# Altium PCB 4_Lay_PCB.PcbDoc (part 1 of 2)
Units mm, origin at the board's own origin, x right, y up, seen from the top; angles counter-clockwise.
Board outline 51.1 x 56.4 mm, 4 copper layers (Top, Signal Layer 1, Signal Layer 2, Bottom), stack 1.641 mm thick; 149 components, 81 nets, 422 pads, 267 vias.
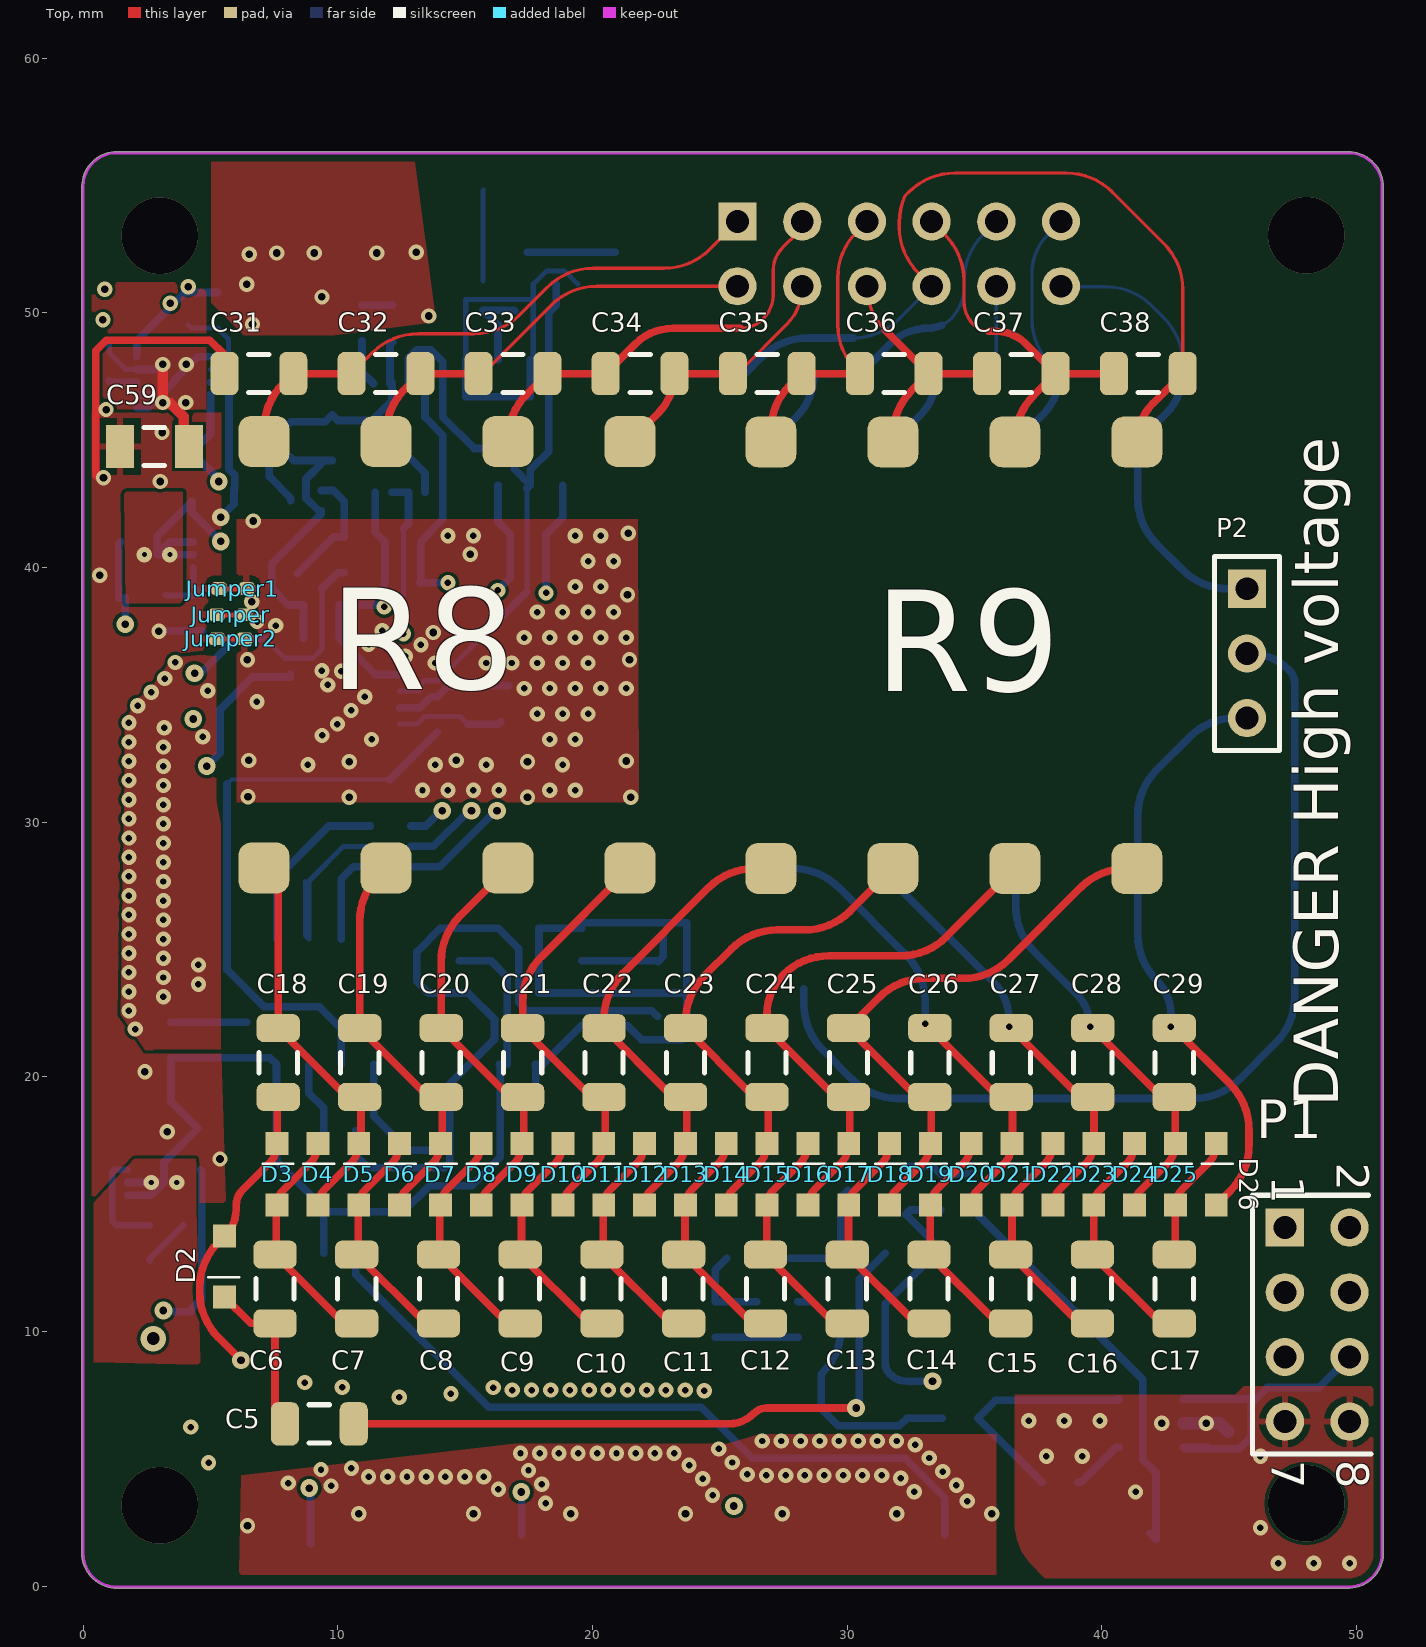
[diagram p0: Top view]
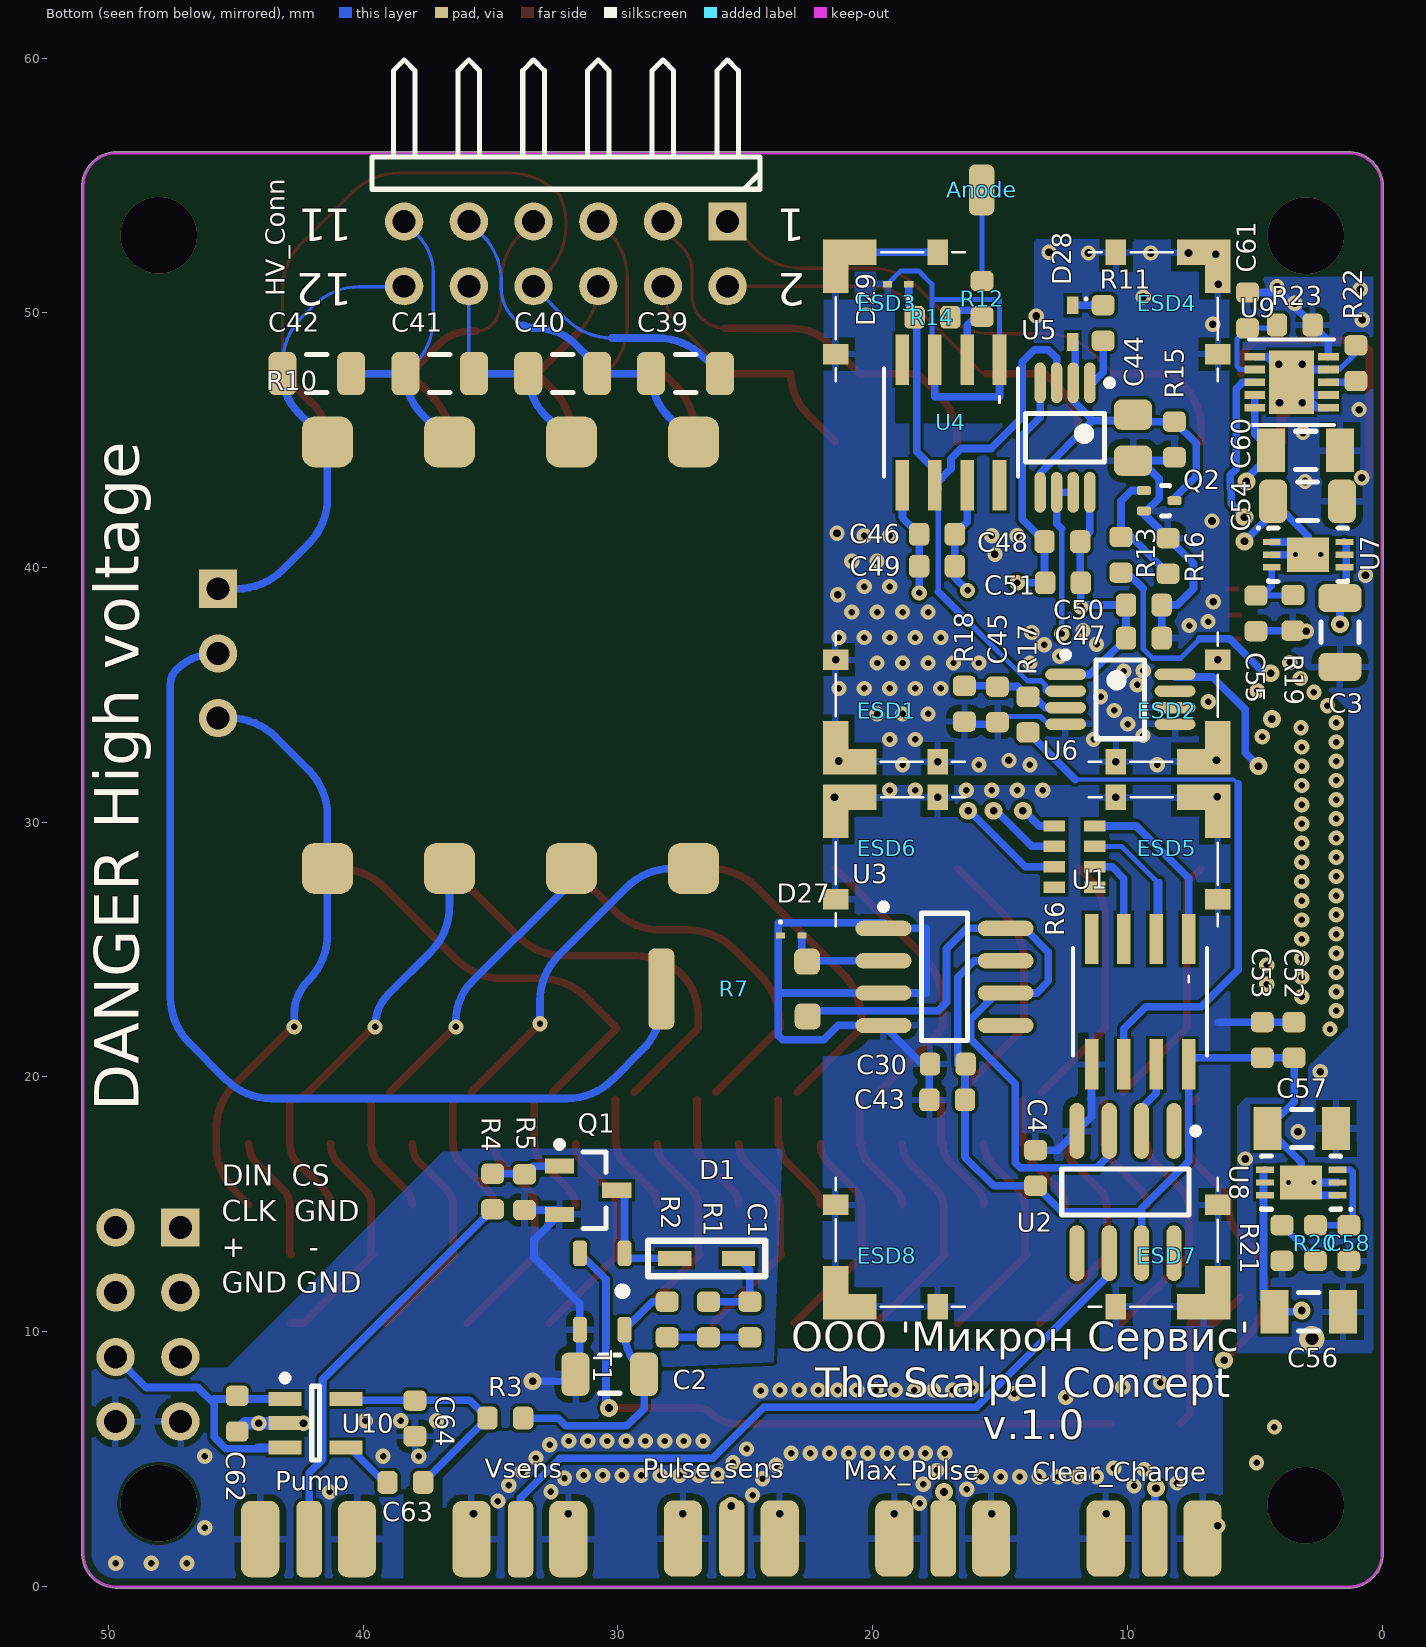
[diagram p1: Bottom view, seen from below]
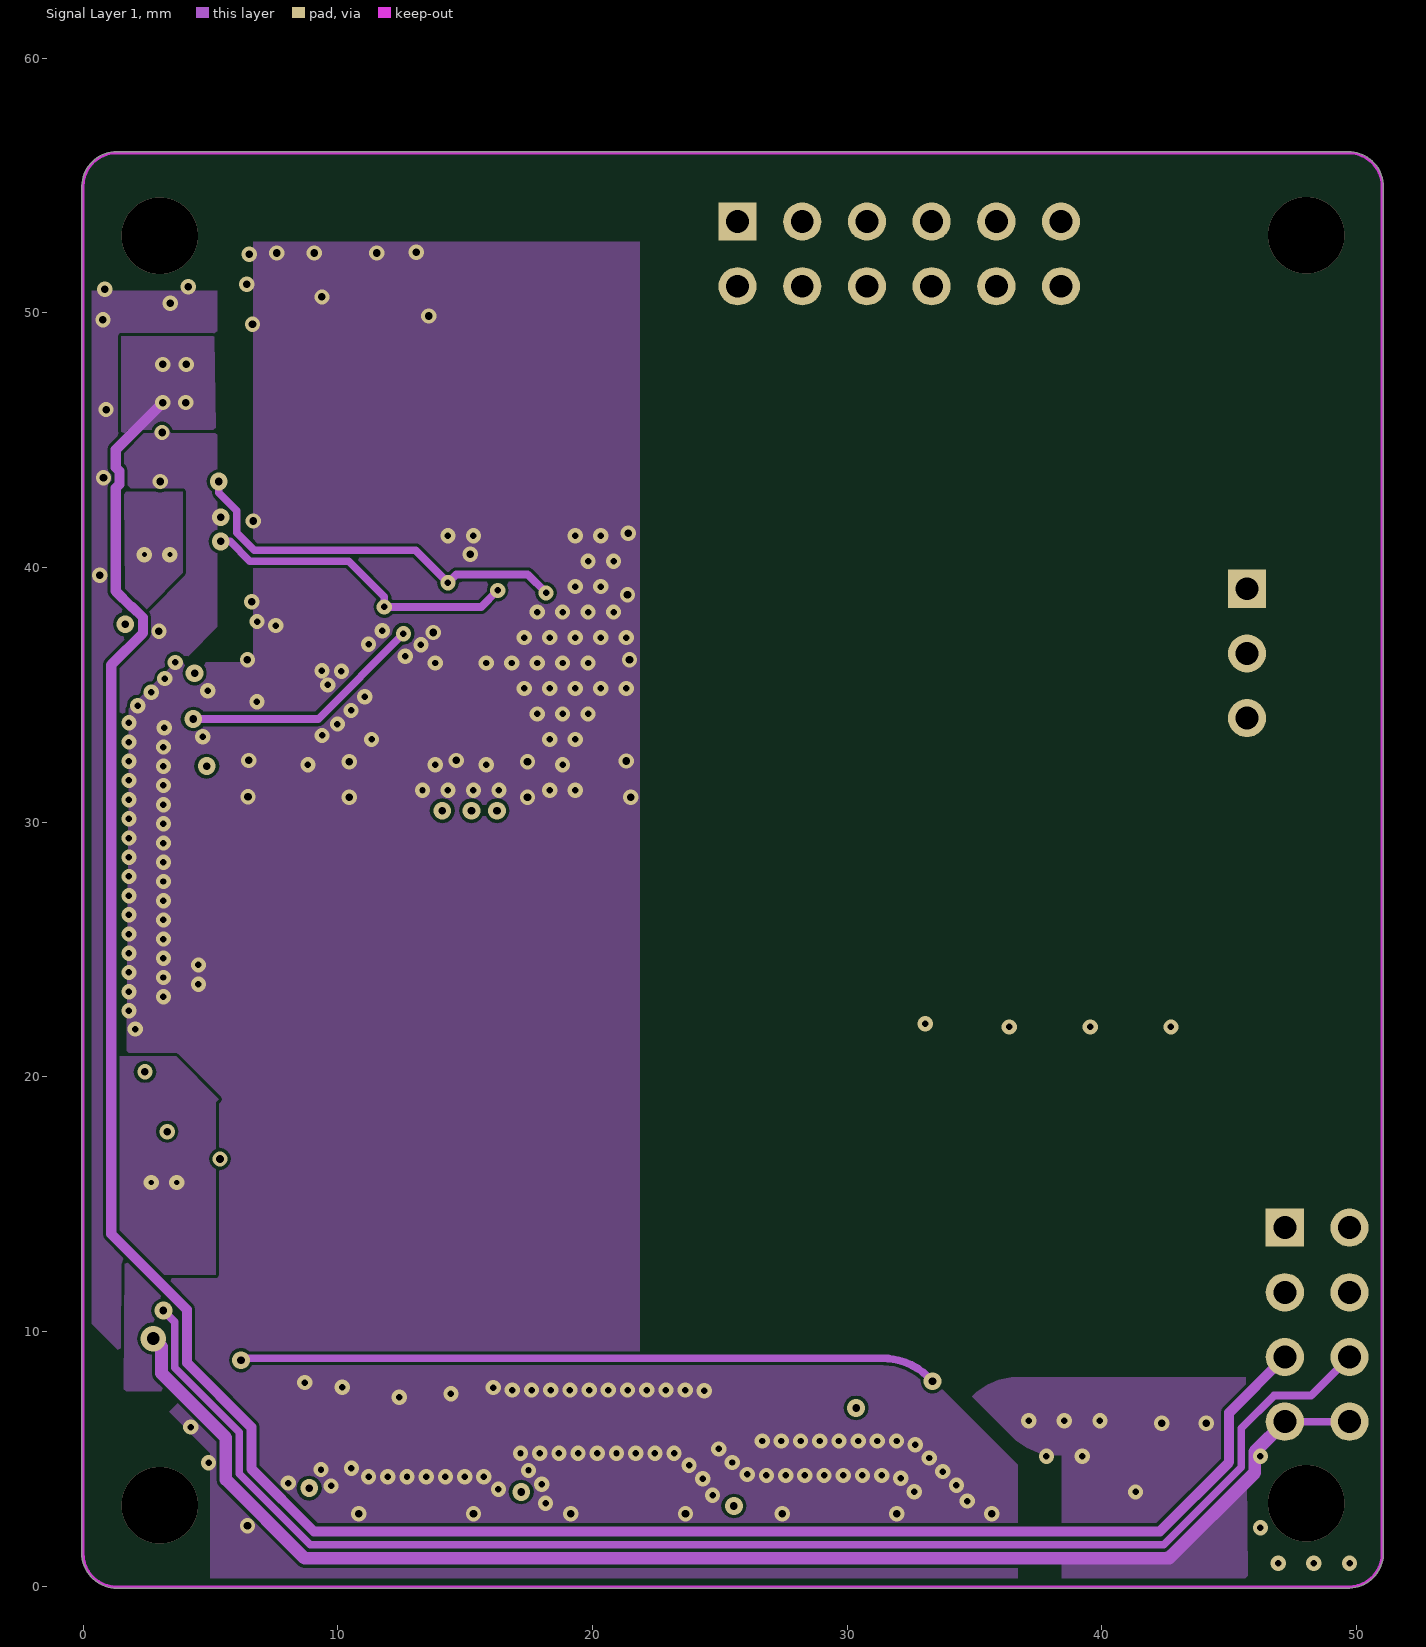
[diagram p2: Signal Layer 1]
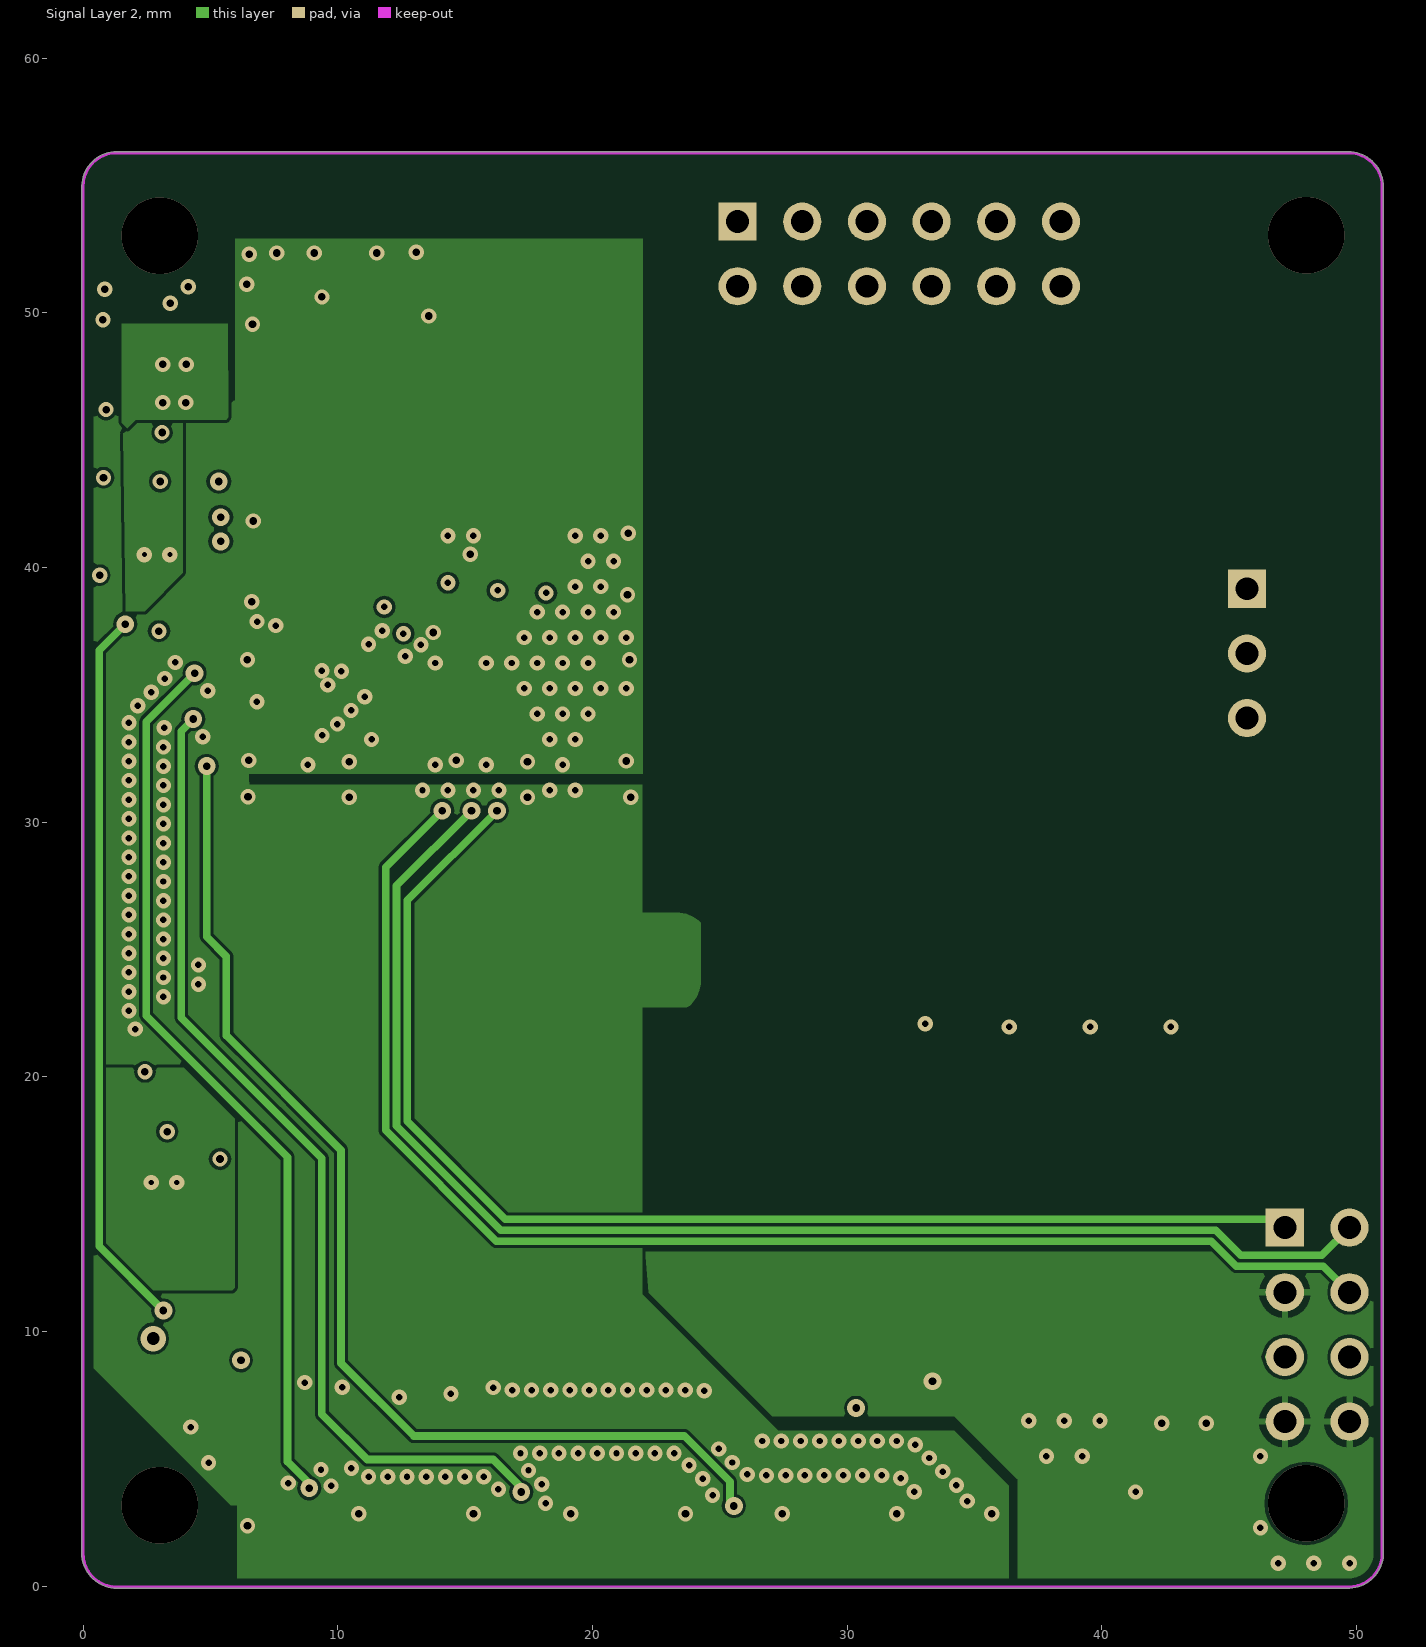
[diagram p3: Signal Layer 2]
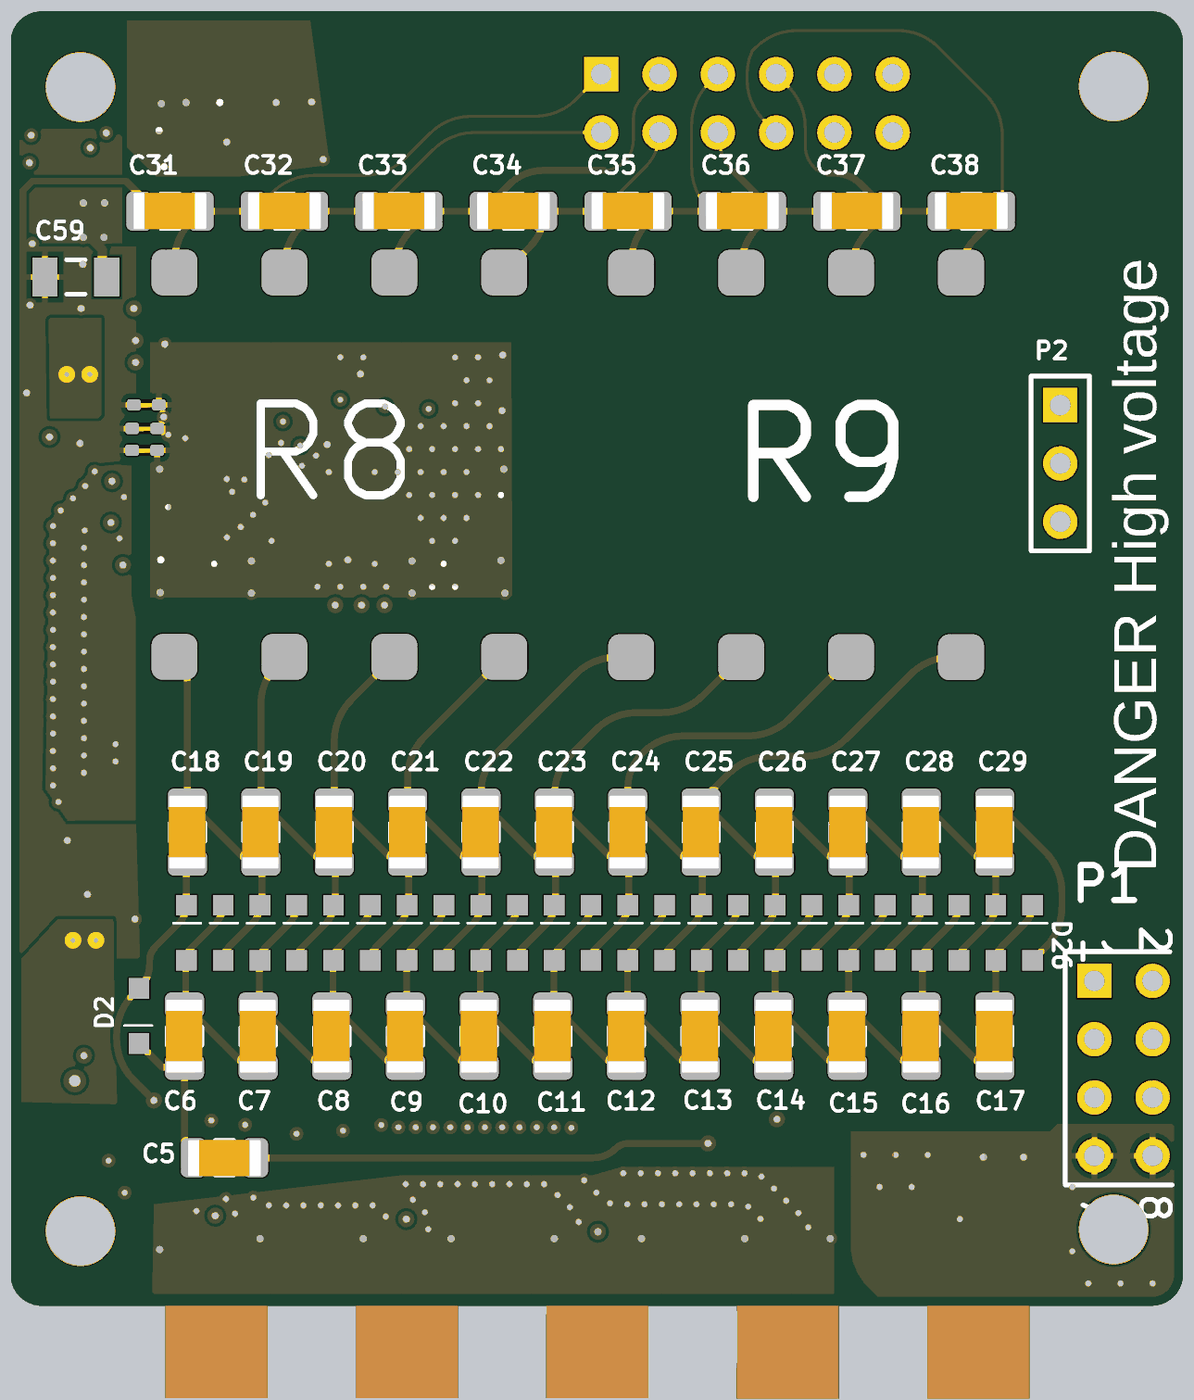
[diagram p5: 3D render of the assembled board from above, using the file's embedded part models]
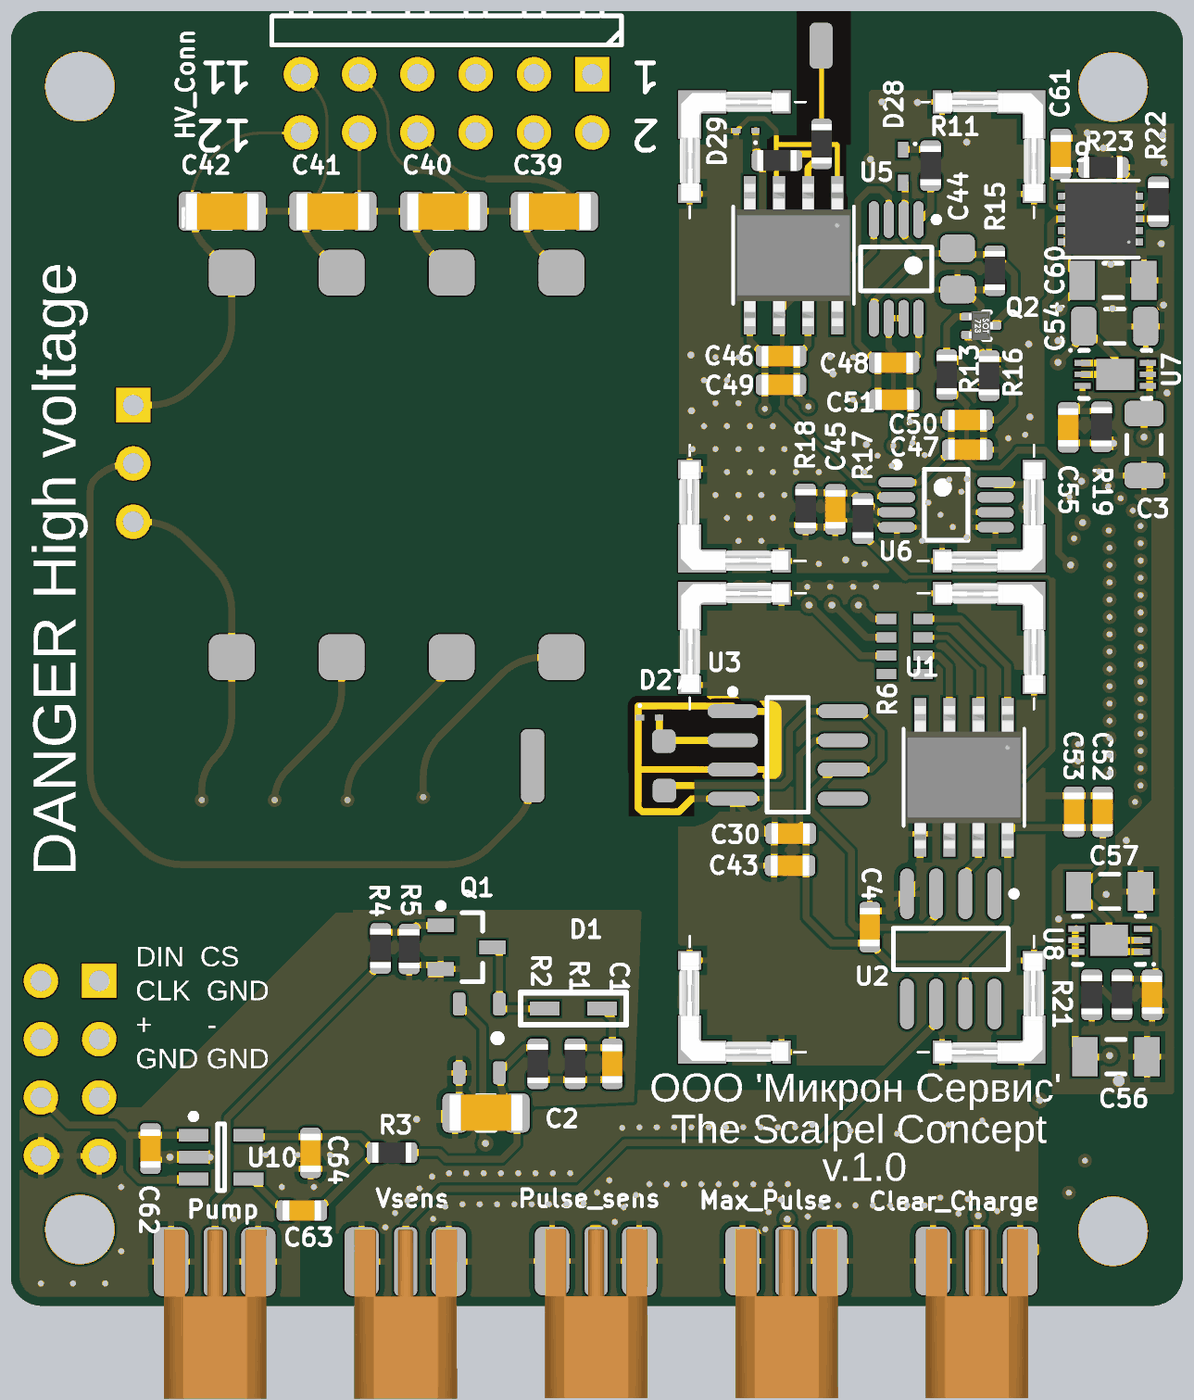
[diagram p6: 3D render of the assembled board from below, using the file's embedded part models]

## Layer stack, top to bottom
Top Solder: solder mask 0.0254, Solder Resist, Dk 3.5
Top: signal copper 0.0356
Pereg: prepreg 0.1702, FR408, Dk 3.66
Signal Layer 1: signal copper 0.0178
Core: core 1.1938, FR408, Dk 3.66
Signal Layer 2: signal copper 0.0178
Pereg: prepreg 0.1702, FR408, Dk 3.66
Bottom: signal copper 0.0356
Bottom Solder: solder mask 0.0254, Solder Resist, Dk 3.5

## Board outline
-0.051,1.295 cw(c0,1.295) -0.05,1.303 -0.05,54.98 cw(c0,54.98) -0.05,54.986 cw(c1.32,54.955) 1.32,56.326 cw(c1.32,56.275) 1.328,56.325 49.68,56.325 cw(c49.68,54.955) 51.051,54.955 cw(c51,54.955) 51.05,54.947 51.05,1.25 cw(c51,1.25) 51.049,1.239 cw(c49.68,1.295) 49.732,-0.075 cw(c49.725,-0.025) 49.725,-0.075 49.716,-0.075 cw(c49.68,1.295) 49.68,-0.076 cw(c49.68,-0.025) 49.672,-0.075 1.32,-0.075 cw(c1.32,1.295)

## Design rules (kind name [scope] priority, off if disabled: settings)
BoardOutlineClearance [All] p1: gap=0.381
Clearance [All] p1: gap=0.127
HoleSize [All] p1: absolutevalues=TRUE maxlimit=6.604 minlimit=0.254 maxpercent=80.000 minpercent=20.000
MinimumAnnularRing [All] p1: minimumring=0.102
PolygonConnect PolygonConnect_via [IsVia] p1: connectstyle=Direct reliefconductorwidth=0.254 reliefentries=4 polygonreliefangle="90 Angle" airgapwidth=0.254
PolygonConnect [All] p2: connectstyle=Relief reliefconductorwidth=0.254 reliefentries=4 polygonreliefangle="90 Angle" airgapwidth=0.254
RoutingTopology [InNet('No Net')] p1: topology=Shortest
RoutingVias [All] p1: holewidth=0.254 width=0.457 viastyle="Through Hole" minholewidth=0.254 minwidth=0.457 maxholewidth=2.54 maxwidth=2.54
SolderMaskExpansion [All] p1: expansion=0.064
Width [All] p1: maxlimit=2.54 minlimit=0.127 preferedwidth=0.254
28 further rules are at their usual default settings.

## Components (designator, comment, footprint, x,y, rotation, side; value= is the part's Value field where it differs from the comment)
Anode "Anode" PMTanode 15.725,54.825 r180 top
C1 "100pF" 1608[0603]_CAP 24.821,10.472 r270 bottom
C2 "4.7uF" C1206#1 30.325,8.325 r0 bottom
C3 "47uF" C1206#1 1.65,37.45 r270 bottom
C4 "1uF" 1608[0603]_CAP 13.6,16.425 r90 bottom
C5 "100nF" C1206#1 9.275,6.375 r0 top
C6 "100nF" C1206#1 7.535,11.673 r270 top
C7 "100nF" C1206#1 10.745,11.673 r270 top
C8 "100nF" C1206#1 13.954,11.673 r270 top
C9 "100nF" C1206#1 17.164,11.673 r270 top
C10 "100nF" C1206#1 20.374,11.673 r270 top
C11 "100nF" C1206#1 23.583,11.673 r270 top
C12 "100nF" C1206#1 26.793,11.673 r270 top
C13 "100nF" C1206#1 30.002,11.673 r270 top
C14 "100nF" C1206#1 33.212,11.673 r270 top
C15 "100nF" C1206#1 36.422,11.673 r270 top
C16 "100nF" C1206#1 39.631,11.673 r270 top
C17 "100nF" C1206#1 42.841,11.673 r270 top
C18 "100nF" C1206#1 7.662,20.563 r270 top
C19 "100nF" C1206#1 10.86,20.563 r270 top
C20 "100nF" C1206#1 14.058,20.563 r270 top
C21 "100nF" C1206#1 17.256,20.563 r270 top
C22 "100nF" C1206#1 20.454,20.563 r270 top
C23 "100nF" C1206#1 23.652,20.563 r270 top
C24 "100nF" C1206#1 26.851,20.563 r270 top
C25 "100nF" C1206#1 30.049,20.563 r270 top
C26 "100nF" C1206#1 33.247,20.563 r270 top
C27 "100nF" C1206#1 36.445,20.563 r270 top
C28 "100nF" C1206#1 39.643,20.563 r270 top
C29 "100nF" C1206#1 42.841,20.563 r270 top
C30 "1uF" 1608[0603]_CAP 17.05,20.5 r0 bottom
C31 "100nF" C1206#1 6.9,47.614 r180 top
C32 "100nF" C1206#1 11.889,47.614 r180 top
C33 "100nF" C1206#1 16.879,47.614 r180 top
C34 "100nF" C1206#1 21.868,47.614 r180 top
C35 "100nF" C1206#1 26.857,47.614 r180 top
C36 "100nF" C1206#1 31.846,47.614 r180 top
C37 "100nF" C1206#1 36.836,47.614 r180 top
C38 "100nF" C1206#1 41.825,47.614 r180 top
C39 "100nF" C1206#1 27.347,47.614 r180 bottom
C40 "100nF" C1206#1 32.173,47.614 r180 bottom
C41 "100nF" C1206#1 36.999,47.614 r180 bottom
C42 "100nF" C1206#1 41.825,47.614 r180 bottom
C43 "100nF" 1608[0603]_CAP 17.075,19.1 r0 bottom
C44 "1nF" 0805_CAP 9.775,45.1 r270 bottom
C45 "1nF" 1608[0603]_CAP 15.1,34.625 r270 bottom
C46 "1uF" 1608[0603]_CAP 17.476,41.305 r0 bottom
C47 "1uF" 1608[0603]_CAP 9.35,37.225 r180 bottom
C48 "1uF" 1608[0603]_CAP 12.551,41.014 r0 bottom
C49 "100nF" 1608[0603]_CAP 17.475,40.05 r0 bottom
C50 "100nF" 1608[0603]_CAP 9.35,38.525 r180 bottom
C51 "100nF" 1608[0603]_CAP 12.525,39.4 r0 bottom
C52 "1uF" 1608[0603]_CAP 3.45,21.45 r90 bottom
C53 "100nF" 1608[0603]_CAP 4.7,21.45 r90 bottom
C54 "4.7uF" C1206#1 2.925,42.6 r180 bottom
C55 "100nF" 1608[0603]_CAP 4.95,38.2 r270 bottom
C56 "47uF" C1206#2 2.875,10.775 r180 bottom
C57 "4.7uF" C1206#2 3.15,17.975 r180 bottom
C58 "100nF" 1608[0603]_CAP 1.303,13.475 r270 bottom
C59 "4.7uF" C1206#2 2.8,44.75 r180 top
C60 "4.7uF" C1206#2 3,44.6 r180 bottom
C61 "100nF" 1608[0603]_CAP 5.275,50.1 r90 bottom
C62 "1uF" 1608[0603]_CAP 44.95,6.775 r270 bottom
C63 "10nF" 1608[0603]_CAP 38.35,4.075 r180 bottom
C64 "1uF" 1608[0603]_CAP 37.973,6.588 r270 bottom
Clear_Charge "MMCX" "MMCX PCB" 8.925,0.35 r0 bottom
D1 "PMEG4010BEA" PMEG4010BEA 26.521,12.872 r0 bottom
D2 "" DA2JF8100L 5.55,13.75 r270 top
D3 "" DA2JF8100L 7.614,14.975 r90 top
D4 "" DA2JF8100L 9.218,14.975 r90 top
D5 "" DA2JF8100L 10.821,14.975 r90 top
D6 "" DA2JF8100L 12.424,14.975 r90 top
D7 "" DA2JF8100L 14.028,14.975 r90 top
D8 "" DA2JF8100L 15.631,14.975 r90 top
D9 "" DA2JF8100L 17.235,14.975 r90 top
D10 "" DA2JF8100L 18.838,14.975 r90 top
D11 "" DA2JF8100L 20.441,14.975 r90 top
D12 "" DA2JF8100L 22.045,14.975 r90 top
D13 "" DA2JF8100L 23.648,14.975 r90 top
D14 "" DA2JF8100L 25.251,14.975 r90 top
D15 "" DA2JF8100L 26.855,14.975 r90 top
D16 "" DA2JF8100L 28.458,14.975 r90 top
D17 "" DA2JF8100L 30.062,14.975 r90 top
D18 "" DA2JF8100L 31.665,14.975 r90 top
D19 "" DA2JF8100L 33.268,14.975 r90 top
D20 "" DA2JF8100L 34.872,14.975 r90 top
D21 "" DA2JF8100L 36.475,14.975 r90 top
D22 "" DA2JF8100L 38.078,14.975 r90 top
D23 "" DA2JF8100L 39.682,14.975 r90 top
D24 "" DA2JF8100L 41.285,14.975 r90 top
D25 "" DA2JF8100L 42.889,14.975 r90 top
D26 "" DA2JF8100L 44.492,14.975 r90 top
D27 "ESD9R3.3ST5G" ONSC-SOD-923-2-514AB-01_V 23.2,25.55 r180 bottom
D28 "DB2S316" SSMini2-F5-B 12.15,49.575 r270 bottom
D29 "ESD9R3.3ST5G" ONSC-SOD-923-2-514AB-01_V 19,51.125 r0 bottom
ESD1 "Harwin Clips" "HARWIN - S0981-46R - CLIP" 21.95,31.875 r180 bottom
ESD2 "Harwin Clips" "HARWIN - S0981-46R - CLIP" 5.95,31.875 r90 bottom
ESD3 "Harwin Clips" "HARWIN - S0981-46R - CLIP" 21.95,52.875 r270 bottom
ESD4 "Harwin Clips" "HARWIN - S0981-46R - CLIP" 5.95,52.875 r0 bottom
ESD5 "Harwin Clips" "HARWIN - S0981-46R - CLIP" 5.95,31.475 r0 bottom locked
ESD6 "Harwin Clips" "HARWIN - S0981-46R - CLIP" 21.95,31.475 r270 bottom locked
ESD7 "Harwin Clips" "HARWIN - S0981-46R - CLIP" 5.95,10.475 r90 bottom locked
ESD8 "Harwin Clips" "HARWIN - S0981-46R - CLIP" 21.95,10.475 r180 bottom locked
HV_Conn "HV_Conn" HDR2X6H 25.696,53.583 r0 bottom locked
Jumper "Value" "0402 jumper" 5.8,38.15 r90 top net-tie
Jumper1 "Value" "0402 jumper" 5.875,39.175 r90 top net-tie
Jumper2 "Value" "0402 jumper" 5.795,37.2 r90 top net-tie
Max_Pulse "MMCX" "MMCX PCB" 17.225,0.35 r0 bottom
P1 "Header 4X2" HDR2X4 47.185,14.08 r270 top
P2 "SelHv" HDR1X3 45.7,39.165 r270 top
Pulse_sens "MMCX" "MMCX PCB" 25.525,0.35 r0 bottom
Pump "MMCX" "MMCX PCB" 42.125,0.325 r0 bottom
Q1 "IRLML6344" SOT-23_N 31.171,15.547 r180 bottom
Q2 "RUM002N05T2L" RUM002N05 8.75,42.625 r180 bottom
R1 "820R" 1608[0603]_RES 26.446,10.472 r270 bottom
R2 "100R" 1608[0603]_RES 28.071,10.472 r90 bottom
R3 "12R" 1608[0603]_RES 34.425,6.6 r0 bottom
R4 "100R" 1608[0603]_RES 34.921,15.497 r90 bottom
R5 "47k" 1608[0603]_RES 33.671,15.472 r90 bottom
R6 "47R" CAT16-470J4LF 11.275,30.25 r270 bottom
R7 "CDHVAF1G00G5000GET" CDHV2512 28.175,23.45 r0 bottom
R8 "MC4-1003JE" MC4 22.496,45.972 r270 top locked
R9 "MC4-1003JE" MC4 42.4,45.958 r270 top
R10 "MC4-1003JE" MC4 26.01,45.958 r270 bottom
R11 "49.9R" 1608[0603]_RES 10.95,49.6 r90 bottom
R12 "49.9R" 1608[0603]_RES 15.7,50.55 r270 bottom
R13 "49.9R" 1608[0603]_RES 10.25,40.5 r270 bottom
R14 "221K" 1608[0603]_RES 17.65,49.825 r180 bottom
R15 "249K" 1608[0603]_RES 8.15,45.025 r270 bottom
R16 "47K" 1608[0603]_RES 8.4,40.45 r90 bottom
R17 "100K" 1608[0603]_RES 13.9,34.225 r90 bottom
R18 "49.9R" 1608[0603]_RES 16.4,34.65 r270 bottom
R19 "249K" 1608[0603]_RES 3.495,38.221 r270 bottom
R20 "249K" 1608[0603]_RES 2.615,13.475 r90 bottom
R21 "249K" 1608[0603]_RES 3.928,13.475 r90 bottom
R22 "10K" 1608[0603]_RES 1.025,48.025 r270 bottom
R23 "49.9K" 1608[0603]_RES 3.425,49.525 r0 bottom
T1 "ATB322524" ATB322515-0110 31.496,10.072 r90 bottom
U1 "LTC1655CS8" SO-8_S 9.5,22.95 r270 bottom
U2 "LTC6240CS8" LT-S8-8_N 10.075,15.475 r270 bottom
U3 "LTC6240CS8" LT-S8-8_N 17.175,23.925 r180 bottom
U4 "LTC6268HS8" SO-8_S 16.925,45.7 r270 bottom
U5 "LTC6253IMS8" LT-MS8-8_N 12.45,45.1 r270 bottom
U6 "LT1711CMS8" LT-MS8_N 10.275,34.825 r180 bottom
U7 "LT3085EDCB" LT-DCB-6_V 2.904,40.504 r180 bottom
U8 "LT3085EDCB" LT-DCB-6_V 3.175,15.85 r0 bottom
U9 "LT3090EDD" DFN-10_DD 3.552,47.275 r0 bottom
U10 "LT1761ES5-3" LT-S5-5-TSOT-23_N 41.875,6.4 r180 bottom
Vsens "MMCX" "MMCX PCB" 33.825,0.325 r0 bottom

## Footprints (in the part's own frame and the unit in brackets; to place one, negate y for a bottom-side part, rotate by r counter-clockwise, add the part's x,y. Pads: shape width x height; smd on the part's side, far side on the other; paste and mask are expansions set on the pad)
"0402 jumper" [mm]
  rrect50% 0.5x0.6 smd: 1(0,0.545) 2(0,-0.545)
  Top region: -0.125,0.275 0.075,0.275 0.075,-0.275 -0.1,-0.275
0805_CAP [mm]
  rrect50% 1.2x1.5 smd: 1(-0.9,0) 2(0.9,0)
  body extent -1.11,-0.72 1.1,0.72, height 0.94
1608[0603]_CAP [mm] "Chip Capacitor, Body 1.6x0.8mm, IPC High Density"
  rrect50% 0.8x0.9 smd: 1(-0.7,0) 2(0.7,0)
  body extent -0.85,-0.45 0.85,0.45, height 0.8
1608[0603]_RES [mm] "Chip Capacitor, Body 1.6x0.8mm, IPC High Density"
  rrect50% 0.8x0.9 smd: 1(-0.7,0) 2(0.7,0)
  body extent -0.85,-0.45 0.85,0.45, height 0.45
ATB322515-0110 [mm]
  rrect50% 1x0.55 smd: 1(0,-1.75) 2(0,0) 3(3,0) 4(3,-1.75)
  silkscreen extent 1.5,-1.68 1.52,-1.66, body extent -0.1,-2.15 3.1,0.35, height 1.55
C1206#1 [mm] "Chip Capacitor, Body 3.2x1.6mm, IPC High Density"
  rrect50% 1.1x1.7 smd: 1(-1.35,0) 2(1.35,0)
  silkscreen extent -0.4,-0.75 0.4,0.75, body extent -1.6,-0.81 1.6,0.79, height 1.6
C1206#2 [mm] "Chip Capacitor, Body 3.2x1.6mm, IPC High Density"
  rect 1.1x1.7 smd: 1(-1.35,0) 2(1.35,0)
  silkscreen extent -0.4,-0.75 0.4,0.75, body extent -1.7,-0.9 1.7,0.9, height 1.3
CAT16-470J4LF [mm]
  rect 0.45x0.85 smd: 1(0.4,0) 2(1.2,0) 3(2,0) 4(2.8,0) 5(0.4,-1.6) 6(1.2,-1.6) 7(2,-1.6) 8(2.8,-1.6)
  body extent 0,-1.6 3.2,0, height 0.5
CDHV2512 [mm]
  rrect50% 1.02x3.18 smd: 1(0.125,0)
  rrect50% 1.02x1.02 smd: 2(-5.625,1.075) 3(-5.6,-1.075)
  body extent -5.85,-1.6 0.5,1.6, height 0.64
DA2JF8100L [mm]
  rect 0.9x0.9 smd: 1(0,0) 2(2.4,0)
  silkscreen extent 1.62,-0.64 1.62,0.57, body extent 0.36,-0.65 2.06,0.6, height 0.7
DFN-10_DD [mil]
  rect 32x12 smd: 1(-57,39.37) 2(-57,19.68) 3(-57,0) 4(-57,-19.69) 5(-57,-39.37) 6(57,-39.37) 7(57,-19.69) 8(57,0) 9(57,19.68) 10(57,39.37)
  rect 69x98 smd paste-48.5: 11(0,0)
  silkscreen extent -66,-66 66,66, body extent -63,-61 63,61, height 32
"HARWIN - S0981-46R - CLIP" [mm]
  rect 1x0.8 smd: 1(0.5,4.5)
  rect 1x2.1 smd: 1(0.5,1.05)
  rect 2.1x1 smd: 1(1.05,0.5)
  rect 0.8x1 smd: 1(4.5,0.5)
  silkscreen extent 0.5,0.5 5.56,5.56, body extent 0.05,0.07 4.81,4.83, height 1.35
HDR1X3 [mm] "Connector; Header; 3 Position"
  rect 1.5x1.5 hole 0.9: 1(0,0)
  round 1.5 hole 0.9: 2(2.54,0) 3(5.08,0)
  silkscreen extent -1.27,-1.27 6.35,1.27
HDR2X4 [mm] "Connector; Header; 4x2 Position"
  rect 1.5x1.5 hole 0.9: 1(0,0)
  round 1.5 hole 0.9: 2(0,2.54) 3(2.54,0) 4(2.54,2.54) 5(5.08,0) 6(5.08,2.54) 7(7.62,0) 8(7.62,2.54)
  silkscreen extent -1.27,-1.27 8.89,3.39
HDR2X6H [mm] "Connector; Header; 6x2 Position; Right Angle"
  rect 1.5x1.5 hole 0.9: 1(0,0)
  round 1.5 hole 0.9: 2(0,2.54) 3(2.54,0) 4(2.54,2.54) 5(5.08,0) 6(5.08,2.54) 7(7.62,0) 8(7.62,2.54) 9(10.16,0) 10(10.16,2.54) 11(12.7,0) 12(12.7,2.54)
  silkscreen extent -1.27,-6.35 13.97,-1.27
LT-DCB-6_V [mm] "SON, 6-Leads, Body 3x2mm, Pitch 0.5mm, Thermal Pad 1.65x1.35mm"
  rect 0.7x0.25 smd mask+0.102: 1(-1.425,0.5) 2(-1.425,0) 3(-1.425,-0.5) 4(1.425,-0.5) 5(1.425,0) 6(1.425,0.5)
  rect 1.65x1.35 smd mask+0.102: 7(0,0)
  silkscreen extent -2,-1.05 1.55,1.1, body extent -1.5,-1 1.5,1, height 0.8
LT-MS8-8_N [mm] "SOP, 8-Leads, Body 3x3mm, Pitch 0.65mm, IPC Medium Density"
  oval 1.6x0.45 smd: 1(-2.15,0.975) 2(-2.15,0.325) 3(-2.15,-0.325) 4(-2.15,-0.975) 5(2.15,-0.975) 6(2.15,-0.325) 7(2.15,0.325) 8(2.15,0.975)
  silkscreen extent -2.27,-1.55 0.95,1.87, body extent -1.55,-1.55 1.55,1.55, height 1.1
LT-MS8_N [mm] "SOP, 8-Leads, Body 3x3mm, Pitch 0.65mm, IPC Medium Density"
  oval 1.6x0.45 smd: 1(-2.15,0.975) 2(-2.15,0.325) 3(-2.15,-0.325) 4(-2.15,-0.975) 5(2.15,-0.975) 6(2.15,-0.325) 7(2.15,0.325) 8(2.15,0.975)
  silkscreen extent -2.28,-1.55 0.95,1.87, body extent -1.55,-1.55 1.55,1.55, height 1.1
LT-S5-5-TSOT-23_N [mm] "SOT23, 5-Leads, Body 2.90x1.63mm, Pitch 0.95mm, IPC Medium Density"
  rect 1.3x0.55 smd: 1(-1.2,0.95) 2(-1.2,0) 3(-1.2,-0.95) 4(1.2,-0.95) 5(1.2,0.95)
  silkscreen extent -1.33,-1.45 0.15,1.9, body extent -0.87,-1.45 0.87,1.45, height 1
LT-S8-8_N [mm] "SOIC, 8-Leads, Body 4.9x3.9mm, Pitch 1.27mm, IPC Medium Density"
  oval 2.2x0.6 smd: 1(-2.4,1.905) 2(-2.4,0.635) 3(-2.4,-0.635) 4(-2.4,-1.905) 5(2.4,-1.905) 6(2.4,-0.635) 7(2.4,0.635) 8(2.4,1.905)
  silkscreen extent -2.52,-2.5 0.9,2.88, body extent -2,-2.5 2,2.5, height 1.76
MC4 [mm]
  rrect50% 2x2 smd: 1(1.025,-1.025) 2(1.025,-5.817) 3(1.025,-10.608) 4(1.025,-15.4) 5(17.775,-1.025) 6(17.775,-5.817) 7(17.775,-10.608) 8(17.775,-15.4)
  body extent -0.32,-17.95 19.15,1.52, height 2
"MMCX PCB" [mm]
  rrect50% 1x3 smd: 1(0,-1.525)
  rrect50% 1.5x3 smd: 2(-1.875,-1.525) 2(1.925,-1.525)
  body extent -2.23,-2.92 2.24,4.45, height 2.15
ONSC-SOD-923-2-514AB-01_V [mm] "SOD, 2-Leads, Body 0.8x0.6mm"
  rect 0.36x0.25 smd: 1(-0.42,0) 2(0.42,0)
  silkscreen extent -0.47,0.48 -0.37,0.57, body extent -0.4,-0.3 0.4,0.3, height 0.4
PMEG4010BEA [mm]
  rect 1.3x0.6 smd: A(-1.25,0) K(1.25,0)
  silkscreen extent -2.3,-0.7 2.3,0.7, body extent -1.1,-0.5 1.1,0.5, height 1.1
PMTanode [mm] "Generic Antenna; 1 Lead"
  rrect50% 1x2 smd far side: 1(0,0)
RUM002N05 [mm] "SOTFL, 3-Leads, Body 1,20x1,20mm, Pitch 0,40mm, IPC Medium Density"
  rrect50% 0.55x0.35 smd: 1(-0.6,0.4) 2(-0.6,-0.4) 3(0.6,0)
  silkscreen extent 0.1,-0.6 0.4,0.6, body extent -0.53,-0.62 0.52,0.63, height 0.45
SO-8_S [mil]
  rect 78x21 smd: 1(-97,75) 2(-97,25) 3(-97,-25) 4(-97,-75) 5(97,-75) 6(97,-25) 7(97,25) 8(97,75)
  silkscreen extent -84,-104 84,104, body extent -122,-99 122,99, height 69
SOT-23_N [mm] "SOT23, 3-Leads, Body 2.9x1.3mm, Pitch 0.95mm, Lead Span 2.3mm, IPC Medium Density"
  rect 1.15x0.6 smd: 1(-1.125,0.95) 2(-1.125,-0.95) 3(1.125,0)
  silkscreen extent -1.25,-1.5 0.7,1.92, body extent -0.7,-1.5 0.7,1.5, height 1.11
SSMini2-F5-B [mm]
  rect 0.7x0.45 smd: 1(-0.725,0) 2(0.725,0)
  silkscreen extent -1.02,0.48 -0.93,0.57, body extent -0.6,-0.4 0.6,0.4, height 0.6

## Part data
Anode: library part Socket, "Socket"
C1 C2 C3 C4 C5 C6 C7 C8 C9 C10 C11 C12 C13 C14 C15 C16 C17 C18 C19 C20 C21 C22 C23 C24 C25 C26 C27 C28 C29 C30 C31 C32 C33 C34 C35 C36 C37 C38 C39 C40 C41 C42 C43 C44 C45 C46 C47 C48 C49 C50 C51 C52 C53 C54 C55 C56 C57 C58 C59 C60 C61 C62 C63 C64: library part "Cap Semi", "Capacitor (Semiconductor SIM Model)"
Clear_Charge Max_Pulse Pulse_sens Pump Vsens: library part SMB, "SMB Straight Connector"
D2 D3 D4 D5 D6 D7 D8 D9 D10 D11 D12 D13 D14 D15 D16 D17 D18 D19 D20 D21 D22 D23 D24 D25 D26 D28: library part Diode, "Default Diode"
D27 D29: "Transient Voltage Suppressor, ESD Protection Diode with Ultra-Low Leakage, 2-Pin SOD-923, Pb-Free, Tape and Reel"
HV_Conn: library part "Header 6X2H", "Header, 6-Pin, Dual row, Right Angle"
Jumper Jumper1 Jumper2 R1 R2 R3 R4 R5 R11 R12 R13 R14 R15 R16 R17 R18 R19 R20 R21 R22 R23: library part "Resistor 0805"
P1: "Header, 4-Pin, Dual row"
P2: library part "Header 3", "Header, 3-Pin"
Q1 Q2: library part IRLML2402, "HEXFET Power MOSFET"
R6 R8 R9 R10: library part CAT16-470J4LF
T1: library part ATB322515-0110
U1: "Imported"
U2 U3: library part LTC6240CS8#PBF, "Single Channel, Low Noise, CMOS Operational Amplifier, RRO, 18 MHz Typical GBW, 10 V/us Typical SR, 2.8 to 6 V, 8-Pin SOIC (S8-8), Commercial, Pb-Free"
U4: library part LTC6268HS8PBF, "Imported"
U5: library part LTC6253IMS8#PBF, "Dual Channel, Power Efficient Operational Amplifier, RRIO, 720 MHz Typical GBW, 280 V/us Typical SR, 2.5 to 5.25 V, 8-Pin SOP (MS8-8), Industrial, Pb-Free"
U6: "4.5 ns, 3 V / 5 V / + / - 5 V, Rail-to-Rail Comparator, 1 Channel, 2.4 to 12 V or + / - 2.4 to + / - 6 V, 0 to +70 degC, 8-pin Plastic MSOP (MS8)"
U7 U8: library part LT3085EDCB#PBF, "Adjustable 500 mA Single Resistor Low Dropout Regulator, 0.3 mA Isupply, 6-pin SON (DCB-6), -40 to 125 degC, Pb-Free"
U9: library part LT3090EDDPBF, "Imported"
U10: "100 mA, Low Noise, LDO Micropower Regulator, 1.8 to 20 V Vin, 3 V Vout, 5-pin SOT23 (S5-5), -40 to 125 degC"

## Via types
v1: diameter 0.6, hole 0.254, Top to Bottom, tented both sides, 175 vias
v2: diameter 0.6, hole 0.3, Top to Bottom, tented both sides, 53 vias
v3: diameter 0.7, hole 0.3, Top to Bottom, tented both sides, 17 vias
v4: diameter 0.6, hole 0.256, Top to Bottom, tented both sides, 13 vias
v5: diameter 0.6, hole 0.2, Top to Bottom, 4 vias
v6: diameter 3, hole 3, Top to Bottom, 4 vias
v7: diameter 1, hole 0.5, Top to Bottom, tented both sides, 1 vias

## Nets (pads, with @x,y where several pads share a name; then routed paths per layer and width w, separated by ;. In a path a pad name is that pad's centre, name@x,y a point inside that pad or via, vN(x,y) a via of type N, cw(c..) or ccw(c..) an arc to the next point about the centre after c; other vN are vias at no path point)
1MV: C45.1 R17.2 R18.1 U6.3 | length 4.6
  Bottom w0.3: U6.3@12.425,34.5 13.225,34.5 13.65,34.925 R17.2@13.9,34.925 14.3,35.325 15.075,35.325 15.1,35.35 R18.1@16.7,35.35
+2.5ANALOG: C46.1 C47.1 C48.1 C49.1 C50.1 C51.1 C54.1 U4.7 U5.8 U6.1 U7.1 U7.2 U7.7 | length 35.5
  Signal Layer 1 w0.3: v3(5.4,41.025) 5.771,41.025 6.548,40.248 10.426,40.248 11.825,38.849 v1(11.825,38.45) 15.625,38.45 v1(16.275,39.1)
  Bottom w0.3: U7.2@4.329,40.504 v5(3.404,40.504) U7.7@2.904,40.504 ; U7.1@4.329,41.004 3.404,41.004 U7.7@2.904,40.504 ; v3(5.4,41.025) 4.275,42.15 C54.1@4.275,42.6 2.904,41.229 U7.7@2.904,40.504 ; U5.8@11.475,42.95 11.475,41.39 C48.1@11.851,41.014 11.851,39.426 C51.1@11.825,39.4 v1@11.825,38.525 ; v1(11.825,38.45) v1@11.825,38.525 ; U6.1@12.425,35.8 11.475,35.8 C47.1@10.05,37.225 C50.1@10.05,38.525 v1@11.825,38.525 ; v1(16.275,39.1) 16.775,39.6 C49.1@16.775,40.05 C49.1@16.775,40.05 C46.1@16.776,41.305 16.29,41.791 U4.7@16.29,43.236
  other v5: 2.404,40.504
+5ANALOG: C4.1 C30.1 C43.1 C52.1 C53.1 C57.1 U1.8 U2.7 U3.7 U8.1 U8.2 U8.7 | length 38.4
  Bottom w0.3: U8.1@1.75,15.35 2.675,15.35 U8.7@3.175,15.85 ; U8.2@1.75,15.85 v5(2.675,15.85) U8.7@3.175,15.85 ; U1.8@7.593,20.484 7.593,16.682 9.44,14.835 9.44,14.7 ; U1.8@7.595,20.486 7.331,20.75 C53.1@4.7,20.75 C52.1@3.45,20.75 3.45,19.025 C57.1@4.5,17.975 3.175,16.65 U8.7@3.175,15.85 ; U2.7@9.44,13.075 9.44,14.7 ; U3.7@14.775,24.56 16.015,24.56 16.657,23.918 C30.1@16.657,20.5 ; C30.1@16.35,20.5 16.375,20.475 C43.1@16.375,19.1 16.375,16.85 15.25,15.725 C4.1@13.6,15.725 12.575,14.7 9.44,14.7
  other v5: 3.675,15.85
-2.5ANALOG: C46.2 C48.2 C49.2 C51.2 C60.1 U4.5 U5.4 U9.9 U9.10 | length 33.9
  Signal Layer 1 w0.3: v3(5.325,43.377) 5.325,42.936 6.027,42.235 6.027,41.373 6.725,40.675 13.05,40.675 v1(14.325,39.4) 14.65,39.725 17.45,39.725 v1(18.175,39)
  Bottom w0.3: U9.9@5,46.775 U9.10@5,46.275 5,45.25 C60.1@4.35,44.6 4.35,44.45 5.325,43.475 v3(5.325,43.377) ; U5.4@13.425,47.25 13.425,45.9 14.125,45.2 14.125,41.888 C48.2@13.251,41.014 13.251,39.426 C51.2@13.225,39.4 v1(14.325,39.4) ; v1(18.175,39) C49.2@18.175,40.05 C49.2@18.175,40.05 C46.2@18.176,41.305 18.83,41.959 U4.5@18.83,43.236
AGND: C4.2 C30.2 C43.2 C44.2 C45.2 C47.2 C50.2 C52.2 C53.2 Clear_Charge.2 D27.1 D29.2 ESD1.1 ESD2.1 ESD3.1 ESD4.1 ESD5.1 ESD6.1 ESD7.1 ESD8.1 Jumper1.2 Jumper2.2 Jumper.2 Max_Pulse.2 Pulse_sens.2 Q2.2 R15.2 R16.2 R18.2 U1.5 U2.4 U3.1 U3.3 U3.4 U4.1 U4.3 U6.4 U6.5 U6.6 Vsens.2 | length 70.7
  Signal Layer 2 w0.2: v2@6.65,41.85 v2(6.675,41.825)
  Bottom w0.2: U6.4@12.425,33.85 13.108,33.85 13.41,34.152 14.798,34.152 C45.2@15.1,33.85 ; U4.1@15.023,47.931 15.023,50.519 ; 15.023,50.527 17.675,50.527 ; U4.3@17.675,47.931 17.675,50.519 17.675,51.125 18.2,51.65 18.895,51.65 D29.2@19.42,51.125
  Bottom w0.3: C52.2@3.45,22.15 C53.2@4.7,22.15 6.425,22.15 ; R15.2@8.15,44.325 8.275,44.2 C44.2@9.475,44.2 ; C47.2@8.65,37.225 C50.2@8.65,38.525 8.05,38.525 7.4,39.175 7.4,40.15 R16.2@8.4,41.15 ; 9.225,42 8.4,41.175 R16.2@8.4,41.15 ; C44.2@9.775,44.2 C44.2@9.475,44.2 ; U1.5@11.405,20.486 11.405,18.45 U2.4@11.98,17.875 12.73,17.125 C4.2@13.6,17.125 ; U4.1@15.02,48.164 15.02,46.7 17.56,46.7 U4.3@17.56,48.164 U4.3@17.675,48.164 ; C45.2@15.1,33.85 16.3,33.85 R18.2@16.4,33.95 ; ESD3.1@17.45,52.375 ESD3.1@20.9,52.375 ; C43.2@17.775,19.1 17.775,20.475 C30.2@17.75,20.5 18.055,20.5 U3.4@19.575,22.02 21.355,22.02 21.925,21.45 23.525,21.45 23.7,21.625 23.7,23.29 ; U3.1@19.575,25.83 17.9,25.83 17.9,23.29 U3.3@19.575,23.29 23.7,23.29 ; U3.1@19.575,26.055 23.7,26.055 23.7,23.29 ; R16.2@8.4,41.15 9.35,42.1 Q2.2@9.35,42.225 9.25,42.225 8.75,42.725 8.75,43.475 C44.2@9.475,44.2
  other v1: 18.157,3.261 34.714,3.344 24.714,3.572 32.633,3.711 16.307,3.811 9.736,3.938 34.289,3.967 18.008,4 8.05,4.05 24.325,4.219 32.1,4.244 11.208,4.299 11.962,4.299 12.716,4.299 13.47,4.299 14.224,4.299 14.978,4.299 15.732,4.299 26.829,4.349 27.583,4.349 28.337,4.349 29.091,4.349 29.845,4.349 30.599,4.349 31.353,4.349 26.076,4.389 33.756,4.5 17.487,4.545 9.339,4.579 10.533,4.635 23.792,4.752 25.486,4.858 33.223,5.034 17.172,5.224 17.926,5.224 18.68,5.224 19.434,5.224 20.188,5.224 20.942,5.224 21.696,5.224 22.45,5.224 23.204,5.224 24.953,5.391 32.677,5.554 26.66,5.701 27.414,5.701 28.168,5.701 28.922,5.701 29.676,5.701 30.43,5.701 31.184,5.701 31.938,5.701 12.413,7.418 14.44,7.554 24.392,7.678 16.853,7.701 17.607,7.701 18.361,7.701 19.115,7.701 19.869,7.701 20.623,7.701 21.377,7.701 22.131,7.701 22.885,7.701 23.639,7.701 10.176,7.81 16.105,7.801 8.701,7.997 2.042,21.877 1.799,22.591 3.151,23.147 1.799,23.345 4.526,23.641 3.151,23.901 1.799,24.099 4.526,24.395 3.151,24.655 1.799,24.853 3.151,25.409 1.799,25.607 3.151,26.163 1.799,26.361 3.151,26.917 1.799,27.115 3.151,27.671 1.799,27.869 3.151,28.425 1.799,28.623 3.151,29.179 1.799,29.377 3.151,29.933 1.799,30.131 3.151,30.687 1.799,30.885 13.325,31.25 14.325,31.25 15.325,31.25 16.325,31.25 18.325,31.25 19.325,31.25 3.151,31.441 1.799,31.639 3.151,32.195 8.825,32.25 13.825,32.25 15.825,32.25 18.825,32.25 1.799,32.393 3.151,32.949 1.799,33.147 11.325,33.25 18.325,33.25 19.325,33.25 4.699,33.358 9.38,33.405 3.184,33.703 9.986,33.854 1.799,33.901 17.825,34.25 18.825,34.25 19.825,34.25 10.519,34.387 2.141,34.572 6.824,34.726 11.052,34.921 2.674,35.106 4.896,35.159 17.325,35.25 18.325,35.25 19.325,35.25 20.325,35.25 21.325,35.25 9.608,35.389 3.207,35.639 10.141,35.922 9.375,35.946 3.618,36.271 13.825,36.25 15.825,36.25 16.825,36.25 17.825,36.25 18.825,36.25 19.825,36.25 12.651,36.52 13.262,36.963 11.207,36.988 17.325,37.25 18.325,37.25 19.325,37.25 20.325,37.25 21.325,37.25 11.74,37.521 7.567,37.719 6.829,37.876 17.825,38.25 18.825,38.25 19.825,38.25 20.825,38.25 19.325,39.25 20.325,39.25 19.825,40.25 20.825,40.25 14.325,41.25 15.325,41.25 19.325,41.25 20.325,41.25
  other v2: 6.45,2.375 10.825,2.85 15.325,2.85 19.15,2.85 23.65,2.85 27.45,2.85 31.95,2.85 35.675,2.85 10.45,30.975 17.45,30.975 21.5,30.975 6.475,31 10.45,32.375 17.45,32.375 21.325,32.4 6.5,32.425 14.65,32.425 6.45,36.375 21.45,36.375 13.75,37.45 6.625,38.65 21.375,38.925 15.2,40.525 21.4,41.35 6.65,49.55 13.575,49.875 9.375,50.625 6.425,51.125 6.525,52.3 7.6,52.35 9.075,52.35 11.525,52.35 13.075,52.375
  other v4: 4.925,4.85 4.225,6.25
ANODE: Anode.1 R12.1 | length 3.6
  Bottom w0.2: R12.1@15.7,51.25 15.7,54.8 Anode.1@15.725,54.825
CLEAR_CHARGE: Clear_Charge.1 R13.2 | length 47.2
  Signal Layer 2 w0.3: v3(4.375,35.85) 2.475,33.95 2.475,22.4 8.025,16.85 8.025,4.892 8.875,4.042 v3(8.875,3.85)
  Bottom w0.2: 7.15,37.2 7.912,36.438 9.012,36.438 9.375,36.8 9.375,39.175
  Bottom w0.3: v3(4.375,35.85) 4.625,35.85 5.975,37.2 7.15,37.2 ; v3(8.875,3.85) 8.925,3.8 Clear_Charge.1@8.925,1.875 Clear_Charge.1@8.925,1.675 ; 9.375,39.175 10,39.8 R13.2@10.25,39.8
DREF_2.048V: R17.1 U1.6 | length 23.2
  Bottom w0.14: 5.65,31.5 5.825,31.675 12.05,31.675
  Bottom w0.3: 5.65,31.5 5.65,24.2 7.1,22.75 9.275,22.75 10.135,21.89 U1.6@10.135,20.486 ; 12.05,31.675 R17.1@13.9,33.525
GND: C2.2 C3.2 C18.2 C31.2 C54.2 C55.2 C56.2 C57.2 C58.2 C59.2 C60.2 C61.2 C62.2 C64.2 D2.1 D3.2 Jumper1.1 Jumper2.1 Jumper.1 P1.3 P1.7 P1.8 Pump.2 Q1.2 R5.1 R19.2 R21.1 R23.1 T1.2 U9.5 U9.8 U10.2 | length 130.5
  Top w0.3: v2(0.8,43.525) 0.6,43.525 0.49,43.635 0.49,48.51 0.906,48.925 4.975,48.925 5.55,48.35 C31.2@5.55,47.614 ; D2.1@5.55,13.75 5.319,13.519 ccw(c7.115,11.723) 4.575,11.723 4.575,11.552 ccw(c7.115,11.552) 5.319,9.756 v3(6.2,8.875) ; D2.1@5.575,13.75 ccw(c4.522,14.803) 6.011,14.803 6.011,14.975 cw(c6.816,14.975) 6.247,15.544 7.287,16.584 ccw(c6.496,17.375) D3.2@7.614,17.375 7.614,19 cw(c7.614,19.457) C18.2@7.291,19.134
  Signal Layer 1 w0.3: v3(6.2,8.875) cw(c6.381,8.694) 6.381,8.95 31.398,8.95 cw(c31.398,6.41) 32.011,8.875 cw(c31.398,6.41) 33.194,8.206 v3(33.35,8.05) ; P1.7@47.185,6.46 P1.8@49.725,6.46
  Signal Layer 1 w0.5: v7(2.75,9.725) 3.073,9.402 3.073,8.359 5.602,5.83 5.602,4.192 8.696,1.098 42.643,1.098 46.002,4.457 46.002,5.277 P1.7@47.185,6.46
  Bottom w0.3: U9.5@2.104,48.275 2.104,48.904 R23.1@2.725,49.525 4,50.8 C61.2@5.275,50.8 ; R19.2@3.245,37.521 R19.2@3.495,37.521 4.679,37.521 C55.2@4.7,37.5 ; U9.8@5,47.275 5.475,47.275 5.725,47.025 5.725,43.864 5.952,43.637 5.952,43.117 5.925,43.09 5.925,42.5 v3(5.4,41.975) ; v3(33.35,8.05) 32.339,8.05 cw(c32.339,8.989) C2.2@31.675,8.325 cw(c32.106,8.756) 31.496,8.756 T1.2@31.496,10.072 31.496,11.097 33.296,12.897 33.296,13.597 Q1.2@32.296,14.597 32.471,14.772 R5.1@33.671,14.772
  Bottom w0.5: U10.2@43.2,6.4 v2(44.1,6.4) 44.625,6.4 C62.2@44.95,6.075
  other v2: 42.35,6.4 5.375,16.775 3.3,17.85 2.425,20.2 2.975,37.502 0.65,39.7 3.025,43.375 3.1,45.3 0.9,46.2 0.775,49.725 3.425,50.375 0.85,50.925 4.125,51.025
  other v4: 46.925,0.9 48.325,0.9 49.725,0.9 46.225,2.3 41.325,3.7 37.825,5.1 39.225,5.1 46.225,5.1 37.125,6.5 38.525,6.5 39.925,6.5
MAXPULSELEVEL: Max_Pulse.1 U5.6 U5.7 | length 56.6
  Signal Layer 1 w0.3: v3(4.325,34.05) 9.225,34.05 v1(12.575,37.4)
  Signal Layer 2 w0.3: v3(4.325,34.05) 3.85,33.575 3.85,22.325 9.375,16.8 9.375,6.75 11.15,4.975 16.1,4.975 17.2,3.875 v3(17.2,3.7)
  Bottom w0.2: v1(12.575,37.4) 12.575,41.525
  Bottom w0.3: U5.7@12.125,42.95 U5.6@12.775,42.95 12.775,41.725 12.575,41.525 ; v3(17.2,3.7) 17.225,3.675 Max_Pulse.1@17.225,2.025
NEGATIVE_V_IN: C59.1 P1.5 R22.1 U9.1 U9.2 U9.4 U9.6 U9.11 | length 103.1
  Top w0.4: v2(3.125,47.975) v2(3.125,46.475) 3.4,46.475 3.95,45.925 3.95,44.95 C59.1@4.15,44.75
  Signal Layer 1 w0.4: v2(3.125,46.475) 1.277,44.627 1.277,43.935 1.427,43.785 1.427,43.265 1.277,43.115 1.277,39.073 1.898,38.452 1.93,38.452 2.348,38.034 2.348,37.423 1.1,36.175 1.1,13.832 4.077,10.855 4.077,8.775 6.606,6.246 6.606,4.608 9.064,2.15 42.275,2.15 44.998,4.873 44.998,6.813 P1.5@47.185,9
  Signal Layer 2 w0.4: P1.5@46.6,9 P1.5@47.185,9
  Bottom w0.2: R22.1@1.025,48.725 1.025,48.425 1.675,47.775 U9.4@2.104,47.775
  Bottom w0.3: U9.1@2.104,46.275 2.552,46.275 U9.11@2.939,46.661 ; U9.2@2.104,46.775 3.052,46.775 U9.11@3.552,47.275 3.552,47.327 4.5,48.275 U9.6@5,48.275 ; U9.4@2.104,47.775 U9.11@3.052,47.775
  other v2: 4.025,46.475 4.05,47.975
NetC1_1: C1.1 D1.A R1.1 | length 3.5
  Bottom w0.3: D1.A@25.271,12.872 24.821,12.422 C1.1@24.821,11.172 R1.1@26.446,11.172
NetC1_2: C1.2 R1.2 R2.1 | length 3.3
  Bottom w0.3: C1.2@24.821,9.772 R1.2@26.446,9.772 R2.1@28.071,9.772
NetC2_1: C2.1 R2.2 R3.1 T1.1 | length 10.6
  Bottom w0.3: R2.2@28.071,11.172 28.646,11.172 T1.1@29.746,10.072 cw(c27.391,10.072) 29.056,8.406 C2.1@28.975,8.325 28.975,6.975 29.65,6.3 32.05,6.3 32.35,6.6 R3.1@33.725,6.6
NetC5_1: C5.1 C6.2 D2.2 | length 6.5
  Top w0.3: D2.2@5.55,11.35 6.577,10.323 C6.2@7.535,10.323 7.535,6.765 C5.1@7.925,6.375
NetC6_1: C6.1 C7.2 D3.1 D4.2 | length 8.6
  Top w0.3: C6.1@7.535,13.023 C7.2@10.235,10.323 ; C6.1@7.586,13.145 D3.1@7.586,14.975 ; D3.1@7.614,14.975 cw(c8.419,14.975) 7.85,15.544 8.89,16.584 ccw(c8.099,17.375) D4.2@9.218,17.375